# EAGLE board MCU_03 (EAGLE 7.3.0)
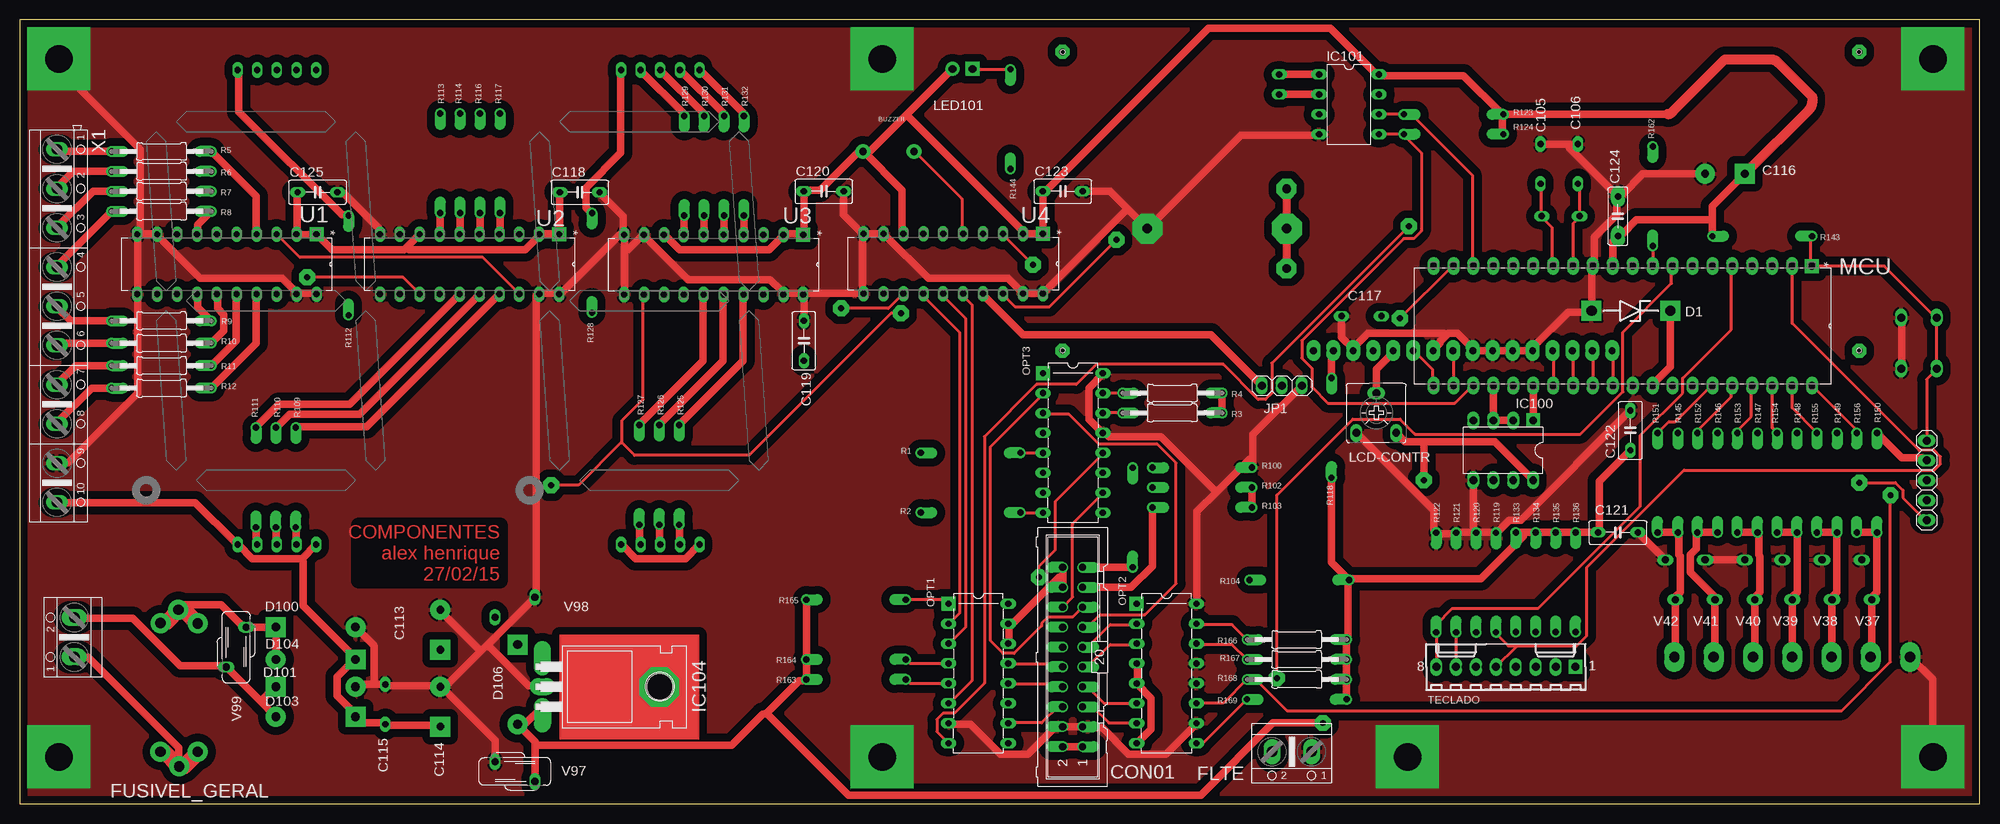
[diagram p0: board, top side]
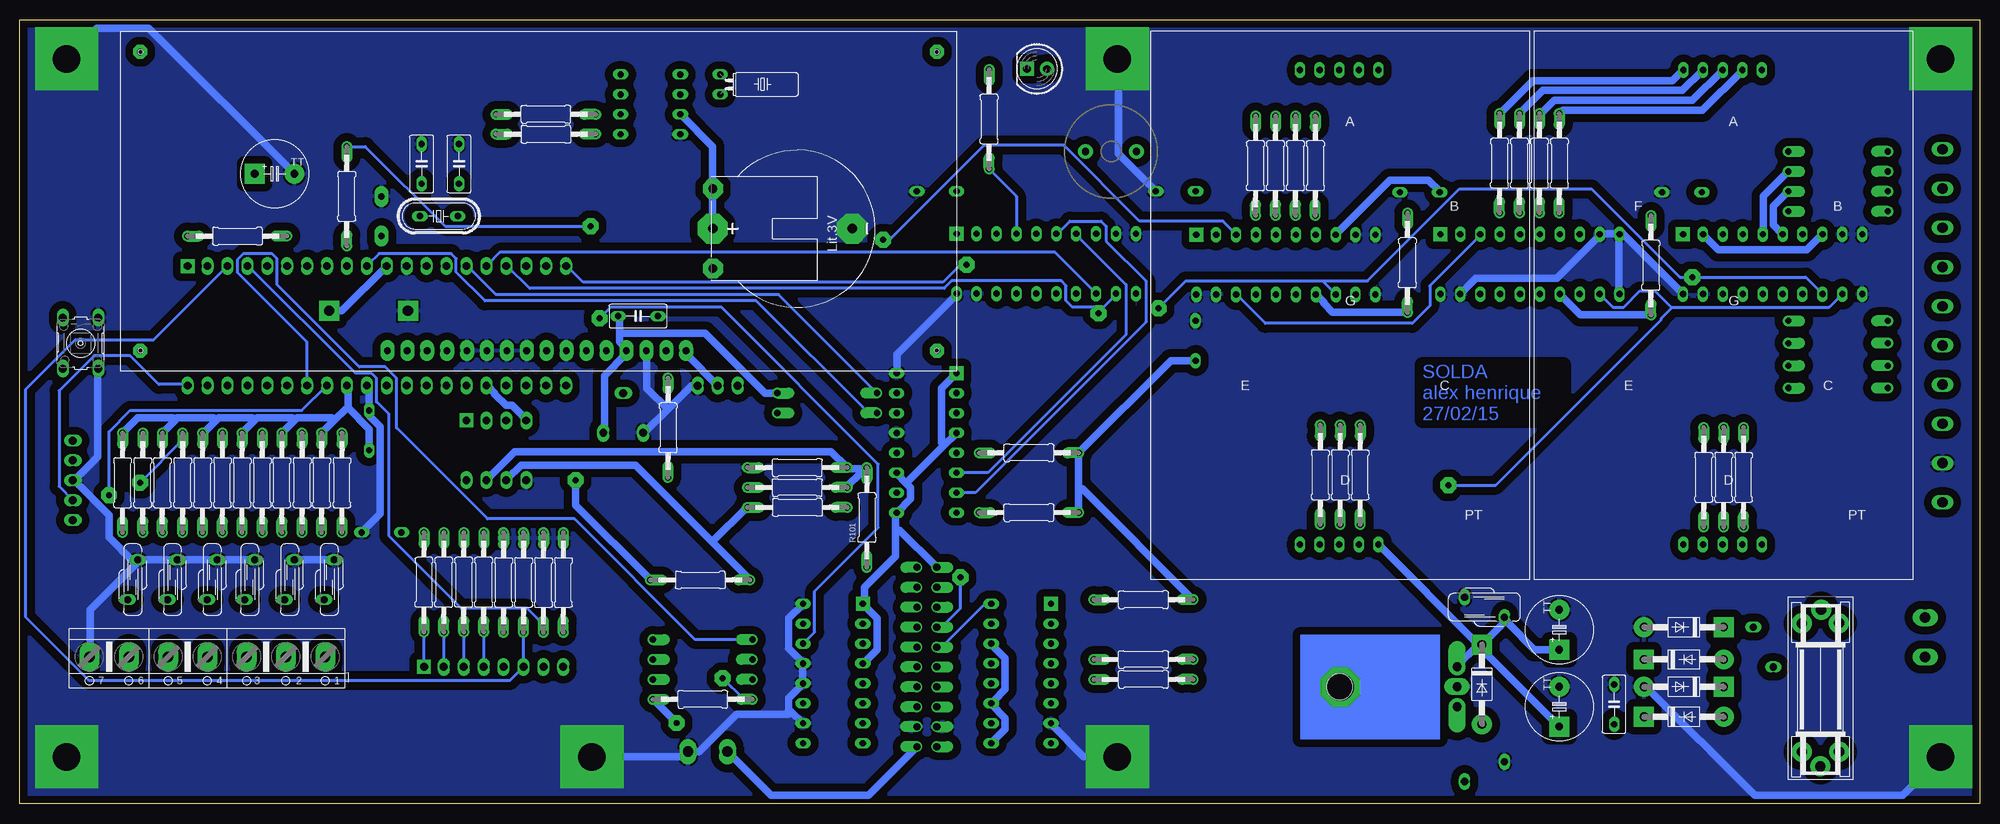
[diagram p1: board, bottom side, seen from below]

Size 250 x 100 mm. Coordinates in mm from the lower left corner, seen from the top.
Outline: 0,0 250,0 250,100 0,100 0,0
Copper layers (1*16): Top 0.035mm / dielectric 1.5mm / Bottom 0.035mm
Design rules "DISPLAY VERY GOOD 002 *": minimum track width 16mil, minimum drill 30mil, track to track 10mil, track to pad 10mil, pad to pad 10mil, via to via 10mil, smd to smd 10mil, copper to edge 20mil, drill to drill 10mil, minimum pad ring 10mil, minimum via ring 25mil, stop-mask expansion 4mil, vias tented up to drill 0mil, thermal gap 10mil
Net classes: 1 rele: width 0.305 mm, clearance 0.254 mm; 2 power: width 0.965 mm, drill 0.051 mm, clearance 0.254 mm

## Footprints (pad centres in the part's own frame; a part is rotated, then mirrored left to right if it is on the bottom)
BUZZER-12MM-NS-KIT = drill 0.9 pad 1.88: + 3.25,0; - -3.25,0
C050-030X075 = drill 0.8 pad 1 long: 1 -2.54,0; 2 2.54,0
TAP5-80 = drill 1 pad 2.54 square: + -2.54,0 | drill 1 pad 2.54: - 2.54,0
C050-025X075 = drill 0.813 pad 1.778 long: 1 -2.54,0; 2 2.54,0
ML20 = drill 0.9 pad 1.016 offset: 1 -11.43,-1.27; 2 -11.43,1.27; 3 -8.89,-1.27; 4 -8.89,1.27; 5 -6.35,-1.27; 6 -6.35,1.27; 7 -3.81,-1.27; 8 -3.81,1.27; 9 -1.27,-1.27; 10 -1.27,1.27; 11 1.27,-1.27; 12 1.27,1.27; 13 3.81,-1.27; 14 3.81,1.27; 15 6.35,-1.27; 16 6.35,1.27; 17 8.89,-1.27; 18 8.89,1.27; 19 11.43,-1.27; 20 11.43,1.27
ZDIO12.5 = drill 1.3 pad 2.54 square: A 4.953,0; C -5.08,0
DO41-10 = drill 1.118 pad 2.54: A 5.08,0 | drill 1.118 pad 2.54 square: C -5.08,0
AK500/2 = drill 1.321 pad 2.184 long: 1 -2.515,0; 2 2.515,0
SH25 = drill 1.321 pad 2.54: 1 -9.802,0.028; 2 10.18,-0.077; 4 -7.938,2.4; 5 -7.938,-2.362; 6 8.435,2.402; 7 8.475,-2.34
CR2032H = drill 1.118 pad 2.54 octagon: + 5.08,10.795; +@1 -5.08,10.795; - 0,-6.985
DIL08 = drill 1 pad 1.778 square: 1 -3.81,-3.81 | drill 1 pad 1.27 long: 2 -1.27,-3.81; 3 1.27,-3.81; 4 3.81,-3.81; 5 3.81,3.81; 6 1.27,3.81; 7 -1.27,3.81; 8 -3.81,3.81
DIL08' = drill 0.813 long: 1 -3.81,-3.81; 2 -1.27,-3.81; 3 1.27,-3.81; 4 3.81,-3.81; 5 3.81,3.81; 6 1.27,3.81; 7 -1.27,3.81; 8 -3.81,3.81
TO220H = drill 1.118 pad 2.184 offset: 1 -2.54,-10.16; 3 2.54,-10.16 | drill 1.118 pad 2.184 long: 2 0,-10.16 | hole 3.302: 0,4.826
1X03 = drill 1.016 long: 1 -2.54,0; 2 0,0; 3 2.54,0
1X05 = drill 1.016 long: 1 -5.08,0; 2 -2.54,0; 3 0,0; 4 2.54,0; 5 5.08,0
CA6V = drill 1.016 long: A -2.54,-2.54; E 2.54,-2.54; S 0,2.54
LED-5MM = drill 1 pad 1.778: A -1.27,0 | drill 1 pad 1.778 square: K 1.27,0
DIP254P1524X635-40 = drill 0.991 pad 1.778 square: 1 -15.24,48.26 | drill 0.991 long: 2 -15.24,45.72; 3 -15.24,43.18; 4 -15.24,40.64; 5 -15.24,38.1; 6 -15.24,35.56; 7 -15.24,33.02; 8 -15.24,30.48; 9 -15.24,27.94; 10 -15.24,25.4; 11 -15.24,22.86; 12 -15.24,20.32; 13 -15.24,17.78; 14 -15.24,15.24; 15 -15.24,12.7; 16 -15.24,10.16; 17 -15.24,7.62; 18 -15.24,5.08; 19 -15.24,2.54; 20 -15.24,0; 21 0,0; 22 0,2.54; 23 0,5.08; 24 0,7.62; 25 0,10.16; 26 0,12.7; 27 0,15.24; 28 0,17.78; 29 0,20.32; 30 0,22.86; 31 0,25.4; 32 0,27.94; 33 0,30.48; 34 0,33.02; 35 0,35.56; 36 0,38.1; 37 0,40.64; 38 0,43.18; 39 0,45.72; 40 0,48.26
DIL16-3 = drill 0.8 pad 1.778 square: 1 -8.89,-3.81 | drill 0.8 long: 2 -6.35,-3.81; 3 -3.81,-3.81; 4 -1.27,-3.81; 5 1.27,-3.81; 6 3.81,-3.81; 7 6.35,-3.81; 8 8.89,-3.81; 9 8.89,3.81; 10 6.35,3.81; 11 3.81,3.81; 12 1.27,3.81; 13 -1.27,3.81; 14 -3.81,3.81; 15 -6.35,3.81; 16 -8.89,3.81
TC38H = drill 0.813 long: 1 -1.27,0; 2 1.27,0
HC49/S = drill 0.813 long: 1 -2.413,0; 2 2.413,0
0207/12 = drill 0.8 pad 1.422 offset: 1 -6.35,0; 2 6.35,0
B3F-10XX = drill 1.016 long: 1 -3.251,2.261; 2 3.251,2.261; 3 -3.251,-2.261; 4 3.251,-2.261
6410-08 = drill 1.016 pad 1.778 square: 1 8.89,0 | drill 1.016 long: 2 6.35,0; 3 3.81,0; 4 1.27,0; 5 -1.27,0; 6 -3.81,0; 7 -6.35,0; 8 -8.89,0
DIP254P762X508-20 = drill 0.8 pad 1.778 square: 1 -7.62,22.86 | drill 0.8 pad 1.27 long: 2 -7.62,20.32; 3 -7.62,17.78; 4 -7.62,15.24; 5 -7.62,12.7; 6 -7.62,10.16; 7 -7.62,7.62; 8 -7.62,5.08; 9 -7.62,2.54; 10 -7.62,0; 11 0,0; 12 0,2.54; 13 0,5.08; 14 0,7.62; 15 0,10.16; 16 0,12.7; 17 0,15.24; 18 0,17.78; 19 0,20.32; 20 0,22.86
2.3"SINGLE_DIGIT_DISPLAY = drill 0.8 long: A 1.735,29.44; B 4.235,29.44; C 1.735,-31.06; COM -5.765,-31.06; D -0.765,-31.06; E -3.265,-31.06; F -3.265,29.44; G -5.765,29.44; NC 4.235,-31.06; PT -0.765,29.44
2X16LCDTOP = drill 0.85 pad 1.778 long: 1 67.06,2.54; 2 64.52,2.54; 3 61.98,2.54; 4 59.44,2.54; 5 56.9,2.54; 6 54.36,2.54; 7 51.82,2.54; 8 49.28,2.54; 9 46.74,2.54; 10 44.2,2.54; 11 41.66,2.54; 12 39.12,2.54; 13 36.58,2.54; 14 34.04,2.54; 15 69.6,2.54; 16 72.14,2.54 | drill 0.8 pad 1.778 octagon: P$1 2.54,40.64; P$2 2.54,2.54; P$3 104.14,2.54; P$4 104.14,40.64 | hole 0.6: 2.54,40.64; 2.54,2.54; 104.14,2.54; 104.14,40.64
S07K11 = drill 0.914 long: 1 -0.635,-2.54; 2 0.635,2.54
S07K230 = drill 0.914 long: 1 -1.27,-2.54; 2 1.27,2.54
AK500/10 = drill 1.321 long: 1 -22.504,0; 2 -17.501,0; 3 -12.497,0; 4 -7.493,0; 5 -2.489,0; 6 2.489,0; 7 7.493,0; 8 12.497,0; 9 17.501,0; 10 22.504,0
AK500/7 = drill 1.321 pad 2.54 long: 1 -15.037,0; 2 -10.008,0; 3 -5.004,0; 4 0,0; 5 5.004,0; 6 10.008,0; 7 15.037,0

## Placement (x,y rotation side)
BUZZER  BUZZERPTH-NS-KIT  [BUZZER-12MM-NS-KIT]  110.81,83.19 0 bottom
C105  22PF  [C050-030X075]  193.97,81.6 90 bottom
C106  22PF  [C050-030X075]  198.73,81.6 90 bottom
C113  1000uF  [TAP5-80]  53.66,22.2 90 bottom
C114  1000uF  [TAP5-80]  53.66,12.4 90 bottom
C115  100NF  [C050-030X075]  46.65,12.7 90 bottom
C116  1000uF  [TAP5-80]  217.49,80.33 0 bottom
C117  100NF  [C050-030X075]  171.13,62.21 0 bottom
C118  100NF  [C050-030X075]  71.44,78 0 top
C119  100NF  [C050-030X075]  100.01,59.05 90 top
C120  100NF  [C050-030X075]  102.55,78.11 0 top
C121  100NF  [C050-030X075]  203.84,34.61 0 top
C122  100NF  [C050-030X075]  205.42,47.62 90 top
C123  100NF  [C050-030X075]  133.03,78.11 0 top
C124  100NF  [C050-025X075]  203.84,74.93 90 top
C125  100NF  [C050-030X075]  38,78 0 top
CON01  CON-FONTE  [ML20]  134.3,18.73 90 top
D1  ZENER-5V  [ZDIO12.5]  205.42,62.87 180 top
D100  1N4004  [DO41-10]  37.76,22.54 180 bottom
D101  1N4004  [DO41-10]  37.76,14.92 180 bottom
D103  1N4004  [DO41-10]  37.76,11.11 0 bottom
D104  1N4004  [DO41-10]  37.76,18.42 0 bottom
D106  1N4004  [DO41-10]  63.5,15.24 270 bottom
FLTE  AUDIO  [AK500/2]  162.24,6.67 180 top
FUSIVEL_GERAL  FUSESH35  [SH25]  20.32,14.58 90 bottom
G100  CR2032H  [CR2032H]  150.79,73.34 90 bottom
IC100  LTC485N  [DIL08]  189.21,45.09 180 top
IC101  DS1307  [DIL08']  169.54,89.2 270 top
IC104  7805T  [TO220H]  76.84,14.94 270 top
JP1  [1X03]  160.97,53.34 0 top
JP100  ICSP  [1X05]  243.2,41.25 270 top
LCD-CONTR  10K  [CA6V]  173.02,49.85 0 top
LED101  HEART_BEAT  [LED-5MM]  120.25,93.71 180 bottom
MCU  PIC18F4525  [DIP254P1524X635-40]  180.32,53.34 270 top
OPT1  OPTOCOUPLER-CNY74-4H-DIP16  [DIL16-3]  122.27,16.64 270 top
OPT2  OPTOCOUPLER-CNY74-4H-DIP16  [DIL16-3]  146.27,16.64 270 top
OPT3  OPTOCOUPLER-CNY74-4H-DIP16  [DIL16-3]  134.34,46.03 270 top
Q100  32.768kHZ  [TC38H]  160.65,91.74 270 bottom
Q101  20MHZ  [HC49/S]  196.53,74.95 180 bottom
R1  1K  [0207/12]  121.28,44.77 0 bottom
R2  1K  [0207/12]  121.28,37.15 0 bottom
R3  4K7  [0207/12]  147,49.85 180 top
R4  4K7  [0207/12]  147,52.39 180 top
R5  470R  [0207/12]  18.1,83.19 180 top
R6  470R  [0207/12]  18.1,80.64 180 top
R7  470R  [0207/12]  18.1,78.11 180 top
R8  470R  [0207/12]  18.1,75.56 180 top
R9  470R  [0207/12]  18.1,61.59 180 top
R10  470R  [0207/12]  18.1,58.74 180 top
R11  470R  [0207/12]  18.1,55.88 180 top
R12  470R  [0207/12]  18.1,53.02 180 top
R100  10k  [0207/12]  150.81,42.88 0 bottom
R101  10k  [0207/12]  141.94,36.51 90 bottom
R102  10k  [0207/12]  150.81,40.34 0 bottom
R103  10k  [0207/12]  150.81,37.8 180 bottom
R104  10k  [0207/12]  163.19,28.55 180 bottom
R109  470R  [0207/12]  35.22,41.63 270 bottom
R110  470R  [0207/12]  32.68,41.63 270 bottom
R111  470R  [0207/12]  30.14,41.63 270 bottom
R112  470R  [0207/12]  41.95,68.67 90 bottom
R113  470R  [0207/12]  53.64,81.68 90 bottom
R114  470R  [0207/12]  56.18,81.68 90 bottom
R116  470R  [0207/12]  58.72,81.68 90 bottom
R117  470R  [0207/12]  61.26,81.68 90 bottom
R118  22R  [0207/12]  167.3,47.94 90 bottom
R119  12K  [0207/12]  188.28,28.24 270 bottom
R120  12K  [0207/12]  185.74,28.24 270 bottom
R121  12K  [0207/12]  183.2,28.24 270 bottom
R122  12K  [0207/12]  180.66,28.24 270 bottom
R123  2K2  [0207/12]  182.88,87.93 0 bottom
R124  2K2  [0207/12]  182.88,85.39 180 bottom
R125  470R  [0207/12]  84.12,41.95 270 bottom
R126  470R  [0207/12]  81.58,41.95 270 bottom
R127  470R  [0207/12]  79.04,41.95 270 bottom
R128  470R  [0207/12]  73,68.98 90 bottom
R129  470R  [0207/12]  84.75,81.36 90 bottom
R130  470R  [0207/12]  87.29,81.36 90 bottom
R131  470R  [0207/12]  89.83,81.36 90 bottom
R132  470R  [0207/12]  92.37,81.36 90 bottom
R133  47K  [0207/12]  190.82,28.26 90 bottom
R134  18K  [0207/12]  193.36,28.26 90 bottom
R135  8K  [0207/12]  195.9,28.26 90 bottom
R136  3K  [0207/12]  198.44,28.26 90 bottom
R143  10K  [0207/12]  222.23,72.39 180 bottom
R144  2K2  [0207/12]  126.36,87.31 90 bottom
R145  12K  [0207/12]  211.48,40.96 270 bottom
R146  12K  [0207/12]  216.56,40.96 270 bottom
R147  12K  [0207/12]  221.64,40.96 270 bottom
R148  12K  [0207/12]  226.67,40.96 270 bottom
R149  12K  [0207/12]  231.8,40.96 270 bottom
R150  12K  [0207/12]  236.88,40.96 270 bottom
R151  1K  [0207/12]  208.89,40.96 270 bottom
R152  1K  [0207/12]  213.97,40.96 270 bottom
R153  1K  [0207/12]  219.05,40.96 270 bottom
R154  1K  [0207/12]  224.13,40.96 270 bottom
R155  1K  [0207/12]  229.21,40.96 270 bottom
R156  1K  [0207/12]  234.29,40.96 270 bottom
R162  1K  [0207/12]  208.28,77.47 270 bottom
R163  1K  [0207/12]  106.68,15.88 0 bottom
R164  1K  [0207/12]  106.68,18.41 0 bottom
R165  1K  [0207/12]  106.68,26.04 0 bottom
R166  4K7  [0207/12]  162.88,20.95 180 top
R167  4K7  [0207/12]  162.88,18.41 180 top
R168  4K7  [0207/12]  162.88,15.88 180 top
R169  4K7  [0207/12]  162.88,13.34 0 bottom
S100  RESET  [B3F-10XX]  242.23,58.74 270 bottom
TECLADO  22-27-2081-08  [6410-08]  189.55,17.46 0 top
U1  TPIC6B595N  [DIP254P762X508-20]  15,65 270 top
U2  TPIC6B595N  [DIP254P762X508-20]  45.95,65 270 top
U3  TPIC6B595N  [DIP254P762X508-20]  77.08,64.95 270 top
U4  TPIC6B595N  [DIP254P762X508-20]  107.63,65.07 270 top
U$101  2.3"DISPLAY_7_SEG  [2.3"SINGLE_DIGIT_DISPLAY]  32.05,64.14 0 bottom
U$102  2X16LCDTOP  [2X16LCDTOP]  237.15,55.25 0 bottom
U$103  2.3"DISPLAY_7_SEG  [2.3"SINGLE_DIGIT_DISPLAY]  80.94,64.14 0 bottom
V37  VARISTORS07K11  [S07K11]  235.59,28.57 180 bottom
V38  VARISTORS07K11  [S07K11]  230.5,28.57 180 bottom
V39  VARISTORS07K11  [S07K11]  225.43,28.57 180 bottom
V40  VARISTORS07K11  [S07K11]  220.66,28.57 180 bottom
V41  VARISTORS07K11  [S07K11]  215.58,28.57 180 bottom
V42  VARISTORS07K11  [S07K11]  210.5,28.57 180 bottom
V97  VARISTORS07K230  [S07K230]  63.18,4.13 90 top
V98  VARISTORS07K230  [S07K230]  63.18,25.08 90 bottom
V99  VARISTORS07K230  [S07K230]  27.62,20 0 top
X1  [AK500/10]  4.76,60.96 270 top
X101  TECLAS-OP  [AK500/7]  226.06,18.75 180 bottom
X102_IN  POWER-IN  [AK500/2]  6.98,21.25 90 top

## Library data of the parts
BUZZER = SparkFun-Electromechanical; PROD_ID: COMP-08253
C105 C106 C113-C125 R1-R12 R100-R104 R109-R114 R116-R136 R143-R156 R162-R169 = rcl
CON01 = con-ml; OC_FARNELL: unknown; OC_NEWARK: unknown
D1 D100 D101 D103 D104 D106 = diode
FLTE X1 X101 X102_IN = con-ptr500; OC_FARNELL: unknown; OC_NEWARK: unknown
FUSIVEL_GERAL = fuse; OC_FARNELL: unknown; OC_NEWARK: unknown
G100 = battery
IC100 = linear-technology; OC_FARNELL: unknown; OC_NEWARK: unknown
IC101 = ds1307_pcf8583
IC104 = linear
JP1 JP100 = pinhead
LCD-CONTR = tango
LED101 = dp_devices
MCU = Microchip_By_element14_Batch_1; MPN: PIC18F4525-I/P; OC_FARNELL: 1212717; OC_NEWARK: 96K3955; PACKAGE: DIP-40; SUPPLIER: Microchip
OPT1-OPT3 = tidyeagle
Q100 Q101 = crystal
S100 = switch-omron; MPN: B3F-1000; OC_FARNELL: 176432; OC_NEWARK: 36M3542
TECLADO = con-molex; OC_FARNELL: unknown; OC_NEWARK: unknown
U1-U4 = Texas Instruments_By_element14_Batch_1; MPN: TPIC6B595N; OC_FARNELL: 1287675; OC_NEWARK: 15M1973; PACKAGE: PDIP-20; SUPPLIER: Texas Instruments
U$101 U$103 = display-alex
U$102 = lcd_modules_ece
V37-V42 V97-V99 = varistor

## Nets
16V-AC-IN1 [power]: FUSIVEL_GERAL.1 X102_IN.1
16V-AC-IN2 [power]: D101.C D103.A V99.1 X102_IN.2
+5V [power]: BUZZER.+ C116.+ C117.1 C118.1 C119.1 C120.1 C121.1 C122.1 C123.1 C124.1 C125.1 D1.C D106.A IC100.8 IC101.8 IC104.3 JP100.2 LCD-CONTR.E LED101.A MCU.11 MCU.32 R1.2 R2.2 R3.1 R4.1 R104.2 R118.1 R123.1 R124.2 R133.2 R134.2 R135.2 R136.2 R143.1 R145.1 R146.1 R147.1 R148.1 R149.1 R150.1 R163.2 R164.2 R165.2 R166.1 R167.1 R168.1 R169.1 U1.1 U1.2 U1.8 U2.1 U2.2 U2.8 U3.1 U3.2 U3.8 U4.1 U4.2 U4.8 U$102.2 V97.1
+12V [power]: C113.+ C114.+ C115.1 D103.C D104.C D106.C IC104.1 U$101.COM U$101.NC U$103.COM U$103.NC V98.1 X1.10
AUDIO [power]: CON01.1 CON01.2 FLTE.2
AVDD [power]: CON01.18 CON01.20 OPT1.9 OPT1.11 OPT1.14 OPT1.15 OPT2.1 OPT2.4 OPT2.5 OPT2.8 OPT3.1 OPT3.4 OPT3.9 OPT3.11
CMD-AUDIO [power]: R148.2 R154.2 V39.2 X101.4
CMD-DESCE [power]: R147.2 R153.2 V40.2 X101.3
CMD-NIVELA [power]: R149.2 R155.2 V38.2 X101.5
CMD-PARA [power]: R146.2 R152.2 V41.2 X101.2
CMD-SOBE [power]: R145.2 R151.2 V42.2 X101.1
CTT_DESCE: OPT1.3 U4.15
CTT_FREIO: OPT1.6 U4.16
CTT_SOBE: OPT1.2 U4.14
D1-A [power]: R129.2 U$103.A
D1-B [power]: R128.2 U$103.B
D1-C [power]: R127.2 U$103.C
D1-D [power]: R126.2 U$103.D
D1-E [power]: R125.2 U$103.E
D1-F [power]: R131.2 U$103.F
D1-G [power]: R132.2 U$103.G
D1-PT [power]: R130.2 U$103.PT
D2-A [power]: R113.2 U$101.A
D2-B [power]: R112.2 U$101.B
D2-C [power]: R111.2 U$101.C
D2-D [power]: R110.2 U$101.D
D2-E [power]: R109.2 U$101.E
D2-F [power]: R116.2 U$101.F
D2-G [power]: R117.2 U$101.G
D2-PT [power]: R114.2 U$101.PT
GND [power]: C105.2 C106.2 C113.- C114.- C115.2 C116.- C117.2 C118.2 C119.2 C120.2 C121.2 C122.2 C123.2 C124.2 C125.2 CON01.3 CON01.4 D1.A D100.A D101.A FLTE.1 G100.- IC100.5 IC101.4 IC104.2 JP1.3 JP100.3 LCD-CONTR.A MCU.12 MCU.31 OPT1.7 OPT2.10 OPT2.12 OPT2.13 OPT2.16 OPT3.13 OPT3.16 R100.1 R119.1 R120.1 R121.1 R122.1 S100.1 S100.2 U1.9 U1.10 U1.11 U1.19 U1.20 U2.9 U2.10 U2.11 U2.19 U2.20 U3.9 U3.10 U3.11 U3.19 U3.20 U4.9 U4.10 U4.11 U4.19 U4.20 U$102.1 U$102.5 U$102.7 U$102.8 U$102.9 U$102.10 V37.1 V38.1 V39.1 V40.1 V41.1 V42.1 V97.2 V98.2 X1.9 X101.7
IR-ATE [power]: R150.2 R156.2 V37.2 X101.6
LCD_BLK [power]: JP1.2 U$102.16
LCD_NEG [power]: JP1.1 U4.17
MAX485-A [power]: IC100.6 R102.1 R103.2 R104.1
MAX485-B [power]: IC100.7 R100.2 R101.2 R102.2
MCLR: JP100.1 MCU.1 R143.2 S100.3 S100.4
N$2: LED101.K R144.2
N$3: U2.3 U3.18
N$4 [power]: R118.2 U$102.15
N$5 [power]: R117.1 U2.4
N$6 [power]: R116.1 U2.5
N$7 [power]: R114.1 U2.6
N$8 [power]: R113.1 U2.7
N$9 [power]: IC101.1 Q100.1
N$10 [power]: IC101.2 Q100.2
N$11 [power]: R112.1 U2.14
N$12 [power]: R111.1 U2.15
N$14 [power]: R110.1 U2.16
N$15 [power]: R109.1 U2.17
N$17: R133.1 TECLADO.4
N$18: U3.3 U4.18
N$19: OPT3.6 U4.7
N$20 [power]: R132.1 U3.4
N$21 [power]: R131.1 U3.5
N$22 [power]: R130.1 U3.6
N$23 [power]: R129.1 U3.7
N$24 [power]: R128.1 U3.14
N$25 [power]: R127.1 U3.15
N$26 [power]: R126.1 U3.16
N$27 [power]: R125.1 U3.17
N$28: OPT3.7 U4.6
N$29: OPT3.5 R1.1
N$30: OPT3.8 R2.1
N$31: R144.1 U4.4
N$32: R134.1 TECLADO.3
N$33: R135.1 TECLADO.2
N$34: R136.1 TECLADO.1
N$35: BUZZER.- U4.5
N$36: CON01.13 OPT3.3
N$37: CON01.15 OPT3.2
N$40: OPT1.1 R165.1
N$41: OPT1.4 R164.1
N$42: OPT1.5 R163.1
N$43: OPT1.8 R162.1
N$45: U1.3 U2.18
N$46 [power]: R5.1 U1.4
N$47 [power]: R6.1 U1.5
N$48 [power]: R7.1 U1.6
N$49 [power]: R8.1 U1.7
N$50 [power]: R9.1 U1.14
N$51 [power]: R10.1 U1.15
N$52 [power]: R11.1 U1.16
N$53 [power]: R12.1 U1.17
N$54 [power]: R5.2 X1.1
N$55 [power]: R6.2 X1.2
N$56 [power]: R7.2 X1.3
N$57 [power]: R8.2 X1.4
N$58 [power]: R9.2 X1.5
N$59 [power]: R10.2 X1.6
N$60 [power]: R11.2 X1.7
N$61 [power]: R12.2 X1.8
OPT_AUDIO_FALA: CON01.16 OPT3.10
OPT_AUDIO_LIGA: CON01.14 OPT3.12
OPT_DESCE: CON01.10 OPT1.13
OPT_FIM_INFERIOR: CON01.7 OPT2.6
OPT_FIM_SUPERIOR: CON01.9 OPT2.3
OPT_FREIO: CON01.8 OPT1.12
OPT_LIGA: CON01.6 OPT1.10
OPT_PANTOGRAFICA: CON01.11 OPT2.2
OPT_SENSOR1: CON01.5 OPT2.7
OPT_SOBE: CON01.12 OPT1.16
RA0: MCU.2 R119.2 TECLADO.5
RA1: MCU.3 R120.2 TECLADO.6
RA2: MCU.4 R121.2 TECLADO.7
RA3: MCU.5 R122.2 TECLADO.8
RA4: MCU.6
RA5: MCU.7
RA6: C105.1 MCU.14 Q101.1
RA7: C106.1 MCU.13 Q101.2
RB0: MCU.33 OPT2.11 R168.2
RB1: MCU.34 OPT2.15 R166.2
RB2: MCU.35 R151.1
RB3: MCU.36 R152.1
RB4: MCU.37 R153.1
RB5: MCU.38 R154.1
RB6: JP100.5 MCU.39 R155.1
RB7: JP100.4 MCU.40 R156.1
RC0: MCU.15 OPT3.15 R4.2
RC1: MCU.16 U1.13 U2.13 U3.13 U4.13
RC2: MCU.17 U1.12 U2.12 U3.12 U4.12
RC3: IC101.6 MCU.18 R123.2
RC4: IC101.5 MCU.23 R124.1
RC5 [power]: IC100.2 IC100.3 MCU.24
RC6 [power]: IC100.4 MCU.25
RC7 [power]: IC100.1 MCU.26
RD0: MCU.19 OPT2.14 R167.2
RD1: MCU.20 U4.3
RD2: MCU.21 U$102.4
RD3: MCU.22 U$102.6
RD4: MCU.27 U$102.11
RD5: MCU.28 U$102.12
RD6: MCU.29 U$102.13
RD7: MCU.30 U$102.14
RE0: MCU.8 OPT2.9 R169.2
RE1: MCU.9 R162.2
RE2: MCU.10 OPT3.14 R3.2
RS485-A [power]: CON01.17 R103.1
RS485-B [power]: CON01.19 R101.1
SAIDA_FUSIVEL [power]: D100.C D104.A FUSIVEL_GERAL.2 V99.2
VBAT+ [power]: G100.+ IC101.3
VOO [power]: LCD-CONTR.S U$102.3

## Tracks (layer width: path | path; a pad name or v marks a point on that pad's centre or on a via)
16V-AC-IN1
  Top 0.965: X102_IN.1 8.73,18.73 20.32,7.14 20.32,4.92 FUSIVEL_GERAL.1
16V-AC-IN2
  Top 0.965: 30.72,13.1 32.54,11.27 D103.A | 30.72,13.1 V99.1 25.88,17.62 20.48,17.62 14.45,23.65 6.99,23.65 X102_IN.2 | 30.72,13.1 32.54,14.92 D101.C
+5V  (via drill 0.76)
  Top 0.965: U4.8 112.55,72.71 112.55,78.26 107.63,83.19 BUZZER.+ | 113.11,87.87 108.27,83.03 BUZZER.+ | 113.11,87.87 118.9,93.66 LED101.A | 113.11,87.87 127.79,73.18 U4.2 127.95,72.71 130.02,72.71 U4.1 130.49,72.71 C123.1 130.97,78.26 151.61,98.9 167.16,98.9 172.88,93.19 IC101.8 173.35,92.87 184.15,92.87 189.07,87.95 R123.1 | BUZZER.+ 107.16,83.34 102.08,78.26 100.49,78.26 C120.1 100.01,72.71 U3.1 99.54,72.71 97.47,72.71 U3.2 97.16,72.23 95.57,70.64 84.14,70.64 82.23,72.55 U3.8 | C118.1 68.9,72.71 U2.1 68.42,72.71 66.36,72.71 U2.2 66.04,72.23 64.45,70.64 49.69,70.64 49.37,70.96 | 49.37,70.96 49.05,70.64 39.85,70.64 37.94,72.55 U1.1 37.47,72.55 35.88,72.55 U1.2 35.4,72.71 35.4,77.95 C125.1 | 49.37,70.96 50.96,72.55 U2.8 | 65.72,7.46 65.72,7.94 D106.A 64.29,10 66.67,12.38 IC104.3 67.15,12.22 | 65.72,7.46 V97.1 | R165.2 R164.2 R163.2 99.85,15.72 99.38,15.72 95.25,11.59 | R124.2 189.07,85.41 189.07,87.47 R123.1 | 215.9,74.45 215.9,76.2 C116.+ | 215.9,74.45 215.9,72.55 R143.1 | MCU.11 203.2,68.74 203.2,71.75 C124.1 204.31,72.55 206.22,74.45 215.9,74.45 | 210.19,87.95 189.71,87.95 R123.1 | 179.07,46.2 176.69,46.2 175.58,47.31 LCD-CONTR.E | 179.07,46.2 188.12,46.2 192.88,41.43 IC100.8 | R4.1 R3.1 | R169.1 R168.1 R167.1 R166.1 169.39,21.43 169.39,28.42 R104.2 | R118.1 167.32,41.59 167.32,30.8 169.23,28.89 R104.2 | 191.77,34.61 R134.2 R135.2 R136.2 C121.1 201.45,35.08 201.45,41.12 C122.1 | 191.77,34.61 R133.2 | JP100.2 243.05,43.81 242.73,44.13 240.03,44.13 237.01,47.15 R150.1 | R104.2 170.02,28.73 186.37,28.73 191.77,34.13 191.77,34.61 | v179.07,41.27 179.07,46.2 | D1.C 210.5,55.72 208.28,53.5 MCU.32
  Top 0.965: v166.21,10.32 159.86,10.32 150.65,1.11 105.73,1.11 95.25,11.59 | 65.72,7.46 90.81,7.46 94.77,11.43 95.25,11.59
  Top 1.27: 210.19,87.95 arc45 210.73,88.17 217.49,94.93 223.31,94.93 arc-45 224.21,94.56 228.6,90.17 228.6,89.43 arc-45 228.23,88.53 C116.+
  Bottom 0.965: U3.8 82.07,72.71 75.25,79.53 70.33,79.53 68.9,78.11 C118.1 | U1.8 20.16,72.55 22.07,70.64 33.34,70.64 35.24,72.55 U1.2 | C119.1 103.19,56.52 R1.2 114.94,40.16 | 114.94,40.16 R2.2 | R165.2 114.46,40.16 114.94,40.16 | D1.C 208.91,62.87 203.2,68.58 MCU.11 | 173.51,60.01 173.51,58.9 172.56,57.94 U$102.2 172.72,57.31 175.42,54.61 175.42,47.47 LCD-CONTR.E | 173.51,60.01 173.51,62.07 C117.1 | R4.1 154.94,52.39 162.56,60.01 173.51,60.01 | C122.1 205.42,47.78 208.12,50.48 | 208.12,50.48 208.12,53.34 MCU.32 | 209.87,48.9 208.44,50.32 208.12,50.48 | 209.87,48.9 211.46,47.31 R145.1 | 214.95,48.9 214.63,49.21 210.19,49.21 209.87,48.9 | 214.95,48.9 216.53,47.31 R146.1 | 220.03,48.9 219.71,49.21 215.26,49.21 214.95,48.9 | 220.03,48.9 221.62,47.31 R147.1 | 224.95,48.9 224.63,49.21 220.34,49.21 220.03,48.9 | 224.95,48.9 226.54,47.31 R148.1 | 230.19,48.9 229.87,49.21 225.27,49.21 224.95,48.9 | 230.19,48.9 231.78,47.31 R149.1 | R150.1 236.85,47.31 234.95,49.21 230.5,49.21 230.19,48.9 | v179.07,41.27 179.07,38.1 169.54,28.57 R104.2 | R169.1 v166.21,10.32
+12V
  Top 0.965: 36.04,31.27 29.69,31.27 27.94,33.02 U$101.NC 27.46,33.34 22.38,38.42 4.76,38.42 X1.10 | 36.04,31.27 37.78,33.02 U$101.COM | C114.+ 53.66,10 46.99,10 C115.1 46.51,10.32 43.66,10.32 42.86,11.11 D103.C 42.7,11.59 40.48,13.81 40.48,16.19 42.7,18.41 D104.C 42.55,18.89 36.2,25.24 36.2,30.8 36.04,31.27 | U$103.NC 76.83,33.02 78.58,31.27 84.93,31.27 86.68,33.02 U$103.COM
  Bottom 0.965: D106.C 60.64,23.18 V98.1 60.17,23.02 56.83,19.68 53.66,19.68 C113.+ | IC104.1 66.67,17.62 63.98,20.32 D106.C | U$103.NC 76.68,33.02 64.29,20.64 D106.C | C114.+ 53.82,10 63.66,19.84 D106.C
AUDIO
  Top 0.965: CON01.1 CON01.2
  Bottom 0.965: CON01.1 141.76,1.11 154.15,1.11 159.7,6.67 FLTE.2
AVDD
  Top 0.965: OPT1.14 126.21,20.48 126.21,22.86 OPT1.15 126.68,23.02 132.56,28.89 133.03,28.89 | CON01.20 133.03,28.89 | 133.03,28.89 CON01.18 | OPT2.8 142.56,7.78 144.3,9.53 144.3,13.49 142.56,15.24 OPT2.5 142.56,15.72 142.56,17.78 OPT2.4
  Bottom 0.965: OPT1.9 126.05,7.78 124.3,9.53 124.3,10.95 126.05,12.7 OPT1.11 125.73,13.18 124.3,14.61 124.3,18.57 126.05,20.32 OPT1.14 | OPT2.4 142.4,17.94 140.65,19.68 140.65,23.65 142.4,25.4 OPT2.1 142.24,25.88 142.24,27.62 138.27,31.59 138.27,34.92 | 136.92,40.88 138.11,42.07 OPT3.11 | 136.92,40.88 136.37,40.32 136.37,38.89 138.11,37.15 OPT3.9 138.27,36.67 138.27,34.92 | 136.92,40.88 132.08,45.72 | 132.08,45.72 130.65,47.15 OPT3.4 | OPT3.1 130.65,54.77 132.4,53.02 132.4,46.04 132.08,45.72 | CON01.20 137.79,34.92 138.27,34.92
CMD-AUDIO
  Top 0.965: R154.2 224.16,34.61 226.54,34.61 R148.2 226.69,34.13 226.69,26.99 226.22,26.51 V39.2 226.06,18.89 X101.4
CMD-DESCE
  Top 0.965: R153.2 219.07,34.61 221.62,34.61 R147.2 221.77,34.13 221.77,31.75 221.93,31.59 221.93,26.99 221.46,26.51 V40.2 221.3,19.05 221.14,18.89 X101.3
CMD-NIVELA
  Top 0.965: R155.2 229.24,34.61 231.78,34.61 R149.2 231.78,34.13 231.78,26.99 231.3,26.51 V38.2 231.14,18.89 X101.5
CMD-PARA
  Top 0.965: R146.2 216.53,34.61 214,34.61 R152.2 213.84,34.13 213.84,32.54 213.04,31.75 213.04,29.53 216.06,26.51 V41.2 216.22,19.05 216.06,18.89 X101.2
CMD-SOBE
  Top 0.965: R151.2 208.91,34.61 211.46,34.61 R145.2 211.61,34.13 211.61,31.75 211.77,31.59 211.77,26.99 211.3,26.51 V42.2 211.14,18.89 X101.1
CTT_DESCE
  Top 0.406: OPT1.3 118.59,20.48 120.65,22.54 120.65,61.91 117.63,64.93 U4.15
CTT_FREIO
  Top 0.406: OPT1.6 118.59,12.86 121.44,15.72 121.44,63.66 120.17,64.93 U4.16
CTT_SOBE
  Top 0.406: OPT1.2 118.59,23.02 119.86,24.29 119.86,60.17 115.09,64.93 U4.14
D1-A
  Top 0.965: U$103.A 79.22,93.5 84.61,88.11 84.61,87.79 R129.2
D1-B
  Top 0.965: U$103.B 76.68,93.5 76.68,83.03 72.23,78.58 72.23,76.04 72.87,75.41 R128.2
D1-C
  Top 0.965: U$103.C 79.06,33.18 79.06,35.56 R127.2
D1-D
  Top 0.965: U$103.D 81.6,33.18 81.6,35.56 R126.2
D1-E
  Top 0.965: U$103.E 84.14,33.18 84.14,35.56 R125.2
D1-F
  Top 0.965: U$103.F 84.3,93.5 89.69,88.11 89.69,87.79 R131.2
D1-G
  Top 0.965: U$103.G 86.84,93.5 92.23,88.11 92.23,87.79 R132.2
D1-PT
  Top 0.965: U$103.PT 81.76,93.5 87.15,88.11 87.15,87.79 R130.2
D2-A
  Bottom 0.965: U$101.A 30.32,93.5 35.4,88.42 53.18,88.42 53.5,88.11 R113.2
D2-B
  Top 0.965: U$101.B 27.94,93.5 27.94,88.27 41.12,75.09 41.91,75.09 R112.2
D2-C
  Top 0.965: U$101.C 30.16,33.18 30.16,35.24 R111.2
D2-D
  Top 0.965: U$101.D 32.7,33.18 32.7,35.24 R110.2
D2-E
  Top 0.965: U$101.E 35.24,33.18 35.24,35.24 R109.2
D2-F
  Bottom 0.965: U$101.F 35.4,93.5 37.94,90.96 55.72,90.96 58.58,88.11 R116.2
D2-G
  Bottom 0.965: U$101.G 37.94,93.5 39.21,92.23 56.99,92.23 61.12,88.11 R117.2
D2-PT
  Bottom 0.965: U$101.PT 32.86,93.5 36.67,89.69 54.29,89.69 56.04,87.95 R114.2
GND  (via drill 1.2 pad 3.81, 3.5 pad 8)
  Top 0.965: 45.24,15.24 43.02,15.24 42.86,15.08 D101.A | 45.24,15.24 46.51,15.24 C115.2 46.99,15.08 53.18,15.08 C114.- | 45.24,15.24 45.24,20.16 42.86,22.54 D100.A | V97.2 60.64,8.1 53.82,14.92 C114.- | 58.82,19.45 54.29,14.92 C114.- | 58.82,19.45 59.69,20.32 | 59.69,20.32 V98.2 65.88,26.83 65.88,64.77 U2.19 66.36,65.09 68.74,65.09 U2.20 69.22,65.25 76.52,72.55 U3.10 | 59.69,20.32 64.93,15.08 66.67,15.08 IC104.2 | 58.82,19.45 53.66,24.61 C113.- | U1.10 15.08,72.55 15.08,65.09 U1.11 15.08,64.61 15.08,52.39 6.19,43.5 4.76,43.5 X1.9 | U1.10 15.56,72.71 17.46,72.71 U1.9 17.78,72.23 23.02,66.99 33.5,66.99 35.08,65.41 U1.19 35.4,65.09 37.78,65.09 U1.20 | C125.2 40.64,77.95 41.27,77.95 45.88,73.34 45.88,72.71 U2.10 | C118.2 73.98,77.95 76.99,74.93 76.99,72.71 U3.10 | 77.15,70.64 77.15,72.07 U3.10 | 77.15,70.64 77.15,65.09 U3.11 | 77.15,70.64 77.63,70.64 79.53,72.55 U3.9 79.85,72.23 85.25,66.83 95.73,66.83 97.16,65.41 U3.19 97.47,65.09 99.54,65.09 U3.20 | C120.2 105.09,75.09 107.47,72.71 U4.10 | U4.10 108.11,72.71 110.01,72.71 U4.9 110.49,72.39 115.89,66.99 126.05,66.99 127.64,65.41 U4.19 127.95,65.09 130.33,65.09 U4.20 130.81,65.41 141.29,75.88 | C119.2 100.01,64.93 U3.20 | U3.20 100.49,65.09 107.47,65.09 U4.11 107.47,65.56 107.47,72.23 U4.10 | V42.1 C121.2 | S100.2 240.03,55.56 240.03,61.91 S100.1 | V40.1 V41.1 | OPT3.16 138.11,54.77 136.37,53.02 136.37,49.05 138.11,47.31 OPT3.13 138.59,47.15 138.91,46.83 145.57,46.83 152.64,39.77 | 165.74,85.41 IC101.4 165.26,85.25 155.73,85.25 144.15,73.66 G100.- 143.67,73.5 141.29,75.88 | C123.2 139.06,78.11 141.29,75.88 | OPT1.7 118.59,10.16 121.28,10.16 125.09,6.35 128.59,6.35 132.08,9.84 CON01.4 CON01.3 136.05,9.68 138.11,9.68 141.45,6.35 146.21,6.35 150.02,10.16 OPT2.10
  Top 0.965: IC100.5 185.42,41.27 185.42,34.77 185.58,34.61 R120.1 | R120.1 186.21,34.61 188.12,34.61 R119.1 188.59,34.77 190.02,36.2 191.45,36.2 C122.2 | R120.1 184.94,34.61 183.67,34.61 R121.1 183.04,34.45 180.66,34.45 R122.1 180.34,34.92 180.34,37.47 170.5,47.31 LCD-CONTR.A | C117.2 168.59,62.07 168.59,59.53 170.18,57.94 U$102.1 170.34,58.42 171.93,60.01 181.61,60.01 181.93,59.69 | 157.32,43.97 157.32,47.15 JP1.3 | 157.32,43.97 157.32,43.02 R100.1 | 197.64,84.14 198.6,84.14 C106.2 | 197.64,84.14 193.99,84.14 C105.2 | C124.2 197.64,83.66 197.64,84.14 | C116.- 207.01,80.33 204.31,77.63 C124.2 | 181.93,59.69 182.25,60.01 183.36,60.01 185.42,57.94 U$102.7 185.9,57.78 187.8,57.78 U$102.8 188.28,57.78 190.34,57.78 U$102.9 190.82,57.78 192.88,57.78 U$102.10 193.04,58.26 197.49,62.71 200.03,62.71 D1.A 200.5,62.87 200.5,68.58 MCU.12 200.82,69.06 200.82,72.23 203.68,75.09 203.68,76.99 C124.2 | 181.93,59.69 181.13,58.9 181.13,58.74 180.34,57.94 U$102.5 | 152.64,39.77 156.84,43.97 157.32,43.97 | 152.64,39.77 150.18,37.31 150.18,25.56 OPT2.16 | v244,6 244,6.03 244,15.88 241.14,18.73 X101.7 | v5,95 5.08,94.93 5.08,93.82 15.4,83.5 15.4,73.18 U1.10
  Bottom 0.965: U2.11 46.04,65.09 46.04,72.55 U2.10 | U2.10 46.51,72.71 48.42,72.71 U2.9 48.74,72.23 53.98,66.99 64.29,66.99 66.2,65.09 U2.19 | U1.20 37.94,65.09 45.56,72.71 U2.10 | MCU.31 205.58,53.34 205.42,53.18 C122.2 205.26,49.69 205.26,49.37 203.99,48.1 203.99,36.99 C121.2 | S100.2 240.03,55.4 240.03,44.29 243.05,41.27 JP100.3 242.73,40.96 238.6,36.83 238.6,33.97 235.43,30.8 V37.1 | V40.1 V39.1 V38.1 V37.1 | X101.7 240.98,18.89 240.98,24.77 235.11,30.64 V37.1 | V41.1 V42.1 | OPT3.16 138.11,54.93 138.11,57.31 130.49,64.93 U4.20 | 151.61,11.75 151.92,12.06 151.92,13.49 150.18,15.24 OPT2.12 150.18,15.72 150.18,17.78 OPT2.13 150.34,18.26 151.92,19.84 151.92,23.65 150.18,25.4 OPT2.16 | 151.61,11.75 150.18,10.32 OPT2.10 | 151.61,11.75 151.92,11.43 158.59,11.43 163.35,6.67 FLTE.1 165.1,6.35 165.42,6.03 176.85,6.03 v177,6 | JP1.3 164.31,53.34 167.32,50.32 | 167.32,50.32 170.34,47.31 LCD-CONTR.A | 167.32,50.32 170.02,53.02 170.02,57.78 U$102.1 | v5,6 5.08,5.87 9.84,1.11 28.73,1.11 42.7,15.08 D101.A | v110,6 110.01,6.03 114.3,6.03 118.43,10.16 OPT1.7 | C120.2 109.86,82.87 109.86,94.93 v110,95 | C116.- 233.52,98.9 240.19,98.9 244,95.09 v244,95
  other vias: 143.83,73.34
  pour Bottom (isolate 1): 0,100.01 250.19,100.01 250.19,0 0,0
  pour Top (isolate 1): 0,100.01 250.19,100.01 250.19,0 0,0
IR-ATE
  Top 0.965: R156.2 234.31,34.61 236.85,34.61 R150.2 236.85,34.13 236.85,26.99 236.38,26.51 V37.2 236.22,18.89 X101.6
LCD_BLK
  Bottom 0.965: JP1.2 164.94,57.31 164.94,57.78 U$102.16
LCD_NEG
  Top 0.965: JP1.1 151.92,59.85 127.95,59.85 122.87,64.93 U4.17
MAX485-A
  Top 0.965: R103.2 157.16,37.94 157.16,40.32 R102.1
  Bottom 0.965: 161.69,33.42 156.84,28.57 R104.1 | 161.69,33.42 171.45,43.18 186.06,43.18 187.8,41.43 IC100.6 | 161.69,33.42 157.32,37.78 R103.2
MAX485-B
  Bottom 0.965: IC100.7 190.34,41.43 186.85,44.93 146.53,44.93 144.62,43.02 R100.2 143.99,42.7 142.08,42.7 R101.2 142.72,42.23 144.46,40.48 R102.2
MCLR
  Top 0.406: R143.2 228.44,72.39 228.44,68.74 MCU.1 228.76,68.58 237.81,68.58 244.32,62.07 S100.3 244.47,61.91 244.47,55.56 S100.4 244.47,55.4 243.21,54.13 243.21,46.35 JP100.1
N$1
  Top 2: 17.78,6.67 18.41,6.67 20.32,4.76 20.95,4.76 22.86,6.67
N$2
  Top 0.406: R144.2 121.6,93.66 LED101.K
N$3
  Bottom 0.406: U3.18 94.77,64.93 91.12,61.28 72.39,61.28 70.17,63.5 70.17,66.04 63.66,72.55 U2.3
N$4
  Top 0.965: R118.2 167.32,54.45 167.32,57.63 167.48,57.78 U$102.15
N$5
  Top 0.965: U2.4 61.28,72.71 61.28,75.25 R117.1
N$6
  Top 0.965: U2.5 58.74,72.71 58.74,75.25 R116.1
N$7
  Top 0.965: U2.6 56.2,72.71 56.2,75.25 R114.1
N$8
  Top 0.965: U2.7 53.66,72.71 53.66,75.25 R113.1
N$9
  Top 0.965: Q100.1 160.66,93.03 165.58,93.03 IC101.1
N$10
  Top 0.965: Q100.2 160.66,90.49 165.58,90.49 IC101.2
N$11
  Bottom 0.965: U2.14 53.5,64.93 50.96,62.39 42.07,62.39 R112.1
N$12
  Top 0.965: U2.15 56.04,64.93 42.07,50.96 33.02,50.96 30.16,48.1 R111.1
N$13  (via drill 3.5)
  other vias: 81.6,14.92
N$14
  Top 0.965: U2.16 58.58,64.93 43.34,49.69 34.45,49.69 32.7,47.94 R110.1
N$15
  Top 0.965: U2.17 61.12,64.93 44.29,48.1 35.24,48.1 R109.1
N$17
  Bottom 0.406: R133.1 TECLADO.4
N$18  (via drill 0.76)
  Top 0.406: v139.86,71.91 131.29,63.34 127,63.34 125.41,64.93 U4.18
  Bottom 0.406: v139.86,71.91 139.06,71.91 127,83.98 116.84,83.98 107.16,74.3 96.52,74.3 94.93,72.71 U3.3
N$19
  Bottom 0.406: OPT3.6 130.49,42.23 126.52,42.23 108.9,59.85 108.9,66.2 115.25,72.55 U4.7
N$20
  Top 0.965: U3.4 92.39,72.71 92.39,74.93 R132.1
N$21
  Top 0.965: U3.5 89.85,72.71 89.85,74.93 R131.1
N$22
  Top 0.965: U3.6 87.31,72.71 87.31,74.93 R130.1
N$23
  Top 0.965: U3.7 84.77,72.71 84.77,74.93 R129.1
N$24
  Bottom 0.965: U3.14 84.61,64.93 83.66,63.98 83.66,63.82 82.55,62.71 73.03,62.71 R128.1
N$25
  Top 0.965: U3.15 87.15,64.93 87.15,56.52 79.06,48.42 R127.1
N$26
  Top 0.965: U3.16 89.69,64.93 89.69,56.52 81.6,48.42 R126.1
N$27
  Top 0.965: U3.17 92.23,64.93 92.23,56.52 84.14,48.42 R125.1
N$28
  Bottom 0.406: OPT3.7 130.49,39.69 128.11,39.69 106.36,61.44 106.36,66.67 111.44,71.75 111.44,73.66 112.08,74.3 116.05,74.3 117.63,72.71 U4.6
N$29
  Top 0.406: R1.1 130.49,44.77 OPT3.5
N$30
  Top 0.406: R2.1 130.49,37.15 OPT3.8
N$31
  Bottom 0.406: R144.1 122.87,77.47 122.87,72.71 U4.4
N$32
  Bottom 0.406: R134.1 TECLADO.3
N$33
  Bottom 0.406: R135.1 TECLADO.2
N$34
  Bottom 0.406: TECLADO.1 R136.1
N$35
  Top 0.406: U4.5 120.17,72.71 120.17,77.15 114.14,83.19 BUZZER.-
N$36
  Top 0.406: CON01.13 136.21,22.54 137.79,24.13 143.51,24.13 147.48,28.1 147.48,43.5 145.1,45.88 137.64,45.88 133.83,49.69 130.65,49.69 OPT3.3
N$37
  Top 0.406: CON01.15 134.3,23.81 131.13,23.81 130.33,23.02 130.33,22.7 126.84,19.21 125.41,19.21 123.83,20.8 123.83,45.56 130.49,52.23 OPT3.2
N$40
  Top 0.406: R165.1 117.95,26.04 118.43,25.56 OPT1.1
N$41
  Top 0.406: R164.1 113.51,17.94 118.43,17.94 OPT1.4
N$42
  Top 0.406: R163.1 113.51,15.4 118.43,15.4 OPT1.5
N$43  (via drill 0.76)
  Top 0.406: v177.16,73.66 159.7,56.2 159.7,52.39 158.91,51.59 157.96,51.59 153.51,56.04 137.32,56.04 134.78,53.5 129.7,53.5 123.03,46.83 123.03,15.4 119.22,11.59 117.79,11.59 117,10.79 117,9.21 118.43,7.78 OPT1.8
  Bottom 0.406: v177.16,73.66 195.74,73.66 205.9,83.82 R162.1
N$45
  Top 0.406: U1.3 32.86,72.55 35.72,69.69 59.05,69.69 63.66,65.09 U2.18
N$46
  Top 0.965: R5.1 30.16,77.47 30.16,72.71 U1.4
N$47
  Bottom 0.965: R6.1 27.62,77.47 27.62,72.71 U1.5
N$48
  Bottom 0.965: R7.1 26.35,76.2 26.35,73.82 25.24,72.71 U1.6
N$49
  Top 0.965: R8.1 22.7,73.82 22.7,72.71 U1.7
N$50
  Top 0.965: R9.1 22.7,63.34 22.7,64.93 U1.14
N$51
  Top 0.965: R10.1 26.04,60.33 26.04,62.39 25.24,63.18 25.24,64.93 U1.15
N$52
  Top 0.965: R11.1 27.62,59.05 27.62,64.93 U1.16
N$53
  Top 0.965: R12.1 30.16,58.74 30.16,64.93 U1.17
N$54
  Top 0.965: R5.2 4.92,83.19 4.76,83.34 X1.1
N$55
  Top 0.965: R6.2 6.83,80.64 4.76,78.58 X1.2
N$56
  Top 0.965: R7.2 9.37,78.11 4.76,73.5 X1.3
N$57
  Top 0.965: R8.2 4.76,68.58 X1.4
N$58
  Top 0.965: R9.2 6.51,61.59 4.76,63.34 X1.5
N$59
  Top 0.965: R10.2 4.92,58.74 4.76,58.58 X1.6
N$60
  Top 0.965: R11.2 7.14,55.88 4.76,53.5 X1.7
N$61
  Top 0.965: R12.2 9.21,53.02 4.76,48.58 X1.8
OPT_AUDIO_FALA
  Top 0.406: CON01.16 134.3,26.35 134.3,35.72 138.11,39.53 OPT3.10
OPT_AUDIO_LIGA  (via drill 0.76)
  Top 0.406: v130.02,28.89 130.02,30.32 132.08,32.38 132.08,38.58 138.11,44.61 OPT3.12
  Bottom 0.406: v130.02,28.89 130.02,24.92 132.4,22.54 CON01.14
OPT_DESCE
  Top 0.406: CON01.10 132.72,17.78 126.21,17.78 OPT1.13
OPT_FIM_INFERIOR
  Top 0.406: CON01.7 136.21,14.92 138.27,12.86 142.4,12.86 OPT2.6
OPT_FIM_SUPERIOR
  Top 0.406: CON01.9 136.21,17.46 139.06,20.32 142.4,20.32 OPT2.3
OPT_FREIO
  Top 0.406: CON01.8 132.72,15.24 126.21,15.24 OPT1.12
OPT_LIGA
  Top 0.406: CON01.6 132.4,12.38 130.33,10.32 126.21,10.32 OPT1.10
OPT_PANTOGRAFICA
  Top 0.406: CON01.11 136.21,20 139.06,22.86 142.4,22.86 OPT2.2
OPT_SENSOR1
  Top 0.406: CON01.5 136.84,12.38 138.91,10.32 142.4,10.32 OPT2.7
OPT_SOBE
  Bottom 0.406: CON01.12 132.4,20 127,25.4 126.21,25.4 OPT1.16
RA0
  Top 0.406: 190.82,20.16 189.87,20.16 188.28,21.75 R119.2 | 190.82,20.16 198.6,20.16 199.87,21.43 199.87,30.16 212.25,42.55 244.16,42.55 244.95,43.34 244.95,44.29 244.16,45.09 242.25,45.09 226.06,61.28 226.06,68.58 MCU.2 | TECLADO.5 190.82,20 190.82,20.16
RA1
  Bottom 0.406: MCU.3 223.52,68.58 232.89,59.21 242.89,59.21 249.24,52.86 249.24,23.81 241.14,15.72 187.48,15.72 TECLADO.6 185.74,21.75 R120.2
RA2
  Top 0.406: TECLADO.7 183.2,21.75 R121.2
  Bottom 0.406: MCU.4 220.82,68.58 207.17,54.93 205.1,54.93 204.47,54.29 204.47,51.28 202.88,49.69 202.88,34.13 193.68,24.92 185.26,24.92 183.2,22.86 183.2,21.91 R121.2
RA3
  Top 0.406: MCU.5 218.28,68.58 218.28,60.48 212.09,54.29 212.09,52.39 206.69,46.99 206.69,37.94 193.68,24.92 182.72,24.92 180.66,22.86 180.66,21.91 R122.2 180.66,21.75 TECLADO.8
RA6
  Top 0.406: C105.1 193.99,79.06 193.99,75.09 Q101.1 194.15,74.77 195.42,73.5 195.42,68.74 MCU.14
RA7
  Top 0.406: C106.1 198.75,79.06 198.91,78.9 198.91,75.09 Q101.2 198.91,74.77 198.12,73.98 198.12,68.74 MCU.13
RB0  (via drill 0.76)
  Top 0.406: OPT2.11 150.18,12.86 153.51,12.86 R168.2 157.64,15.88 161.61,11.91 232.41,11.91 238.6,18.1 v238.6,39.37
  Bottom 0.406: v238.6,39.37 238.6,47.47 235.9,50.16 214,50.16 210.82,53.34 MCU.33
RB1
  Top 0.406: R166.2 154.62,22.86 150.18,22.86 OPT2.15
  Bottom 0.406: R166.2 163.83,20.95 179.23,36.35 190.34,36.35 201.93,47.94 201.93,54.29 203.36,55.72 206.69,55.72 217.17,66.2 217.17,69.53 217.81,70.17 221.46,70.17 222.25,69.37 222.25,67.79 213.36,58.9 213.36,53.5 MCU.34
RB2
  Top 0.406: MCU.35 215.74,53.34 211.14,48.74 210.34,48.74 208.91,47.31 R151.1
RB3
  Top 0.406: MCU.36 218.28,53.34 218.28,51.91 213.84,47.47 R152.1
RB4
  Top 0.406: MCU.37 220.82,53.34 220.82,49.37 218.92,47.47 R153.1
RB5
  Top 0.406: MCU.38 223.52,53.34 223.52,47.94 224,47.47 R154.1
RB6  (via drill 0.76)
  Top 0.406: MCU.39 226.06,53.34 226.06,50.48 229.08,47.47 R155.1 | v234.63,40.96 239.24,40.96 240.19,40.01 240.19,39.05 243.05,36.2 JP100.5
  Bottom 0.406: v234.63,40.96 229.24,46.35 229.24,47.31 R155.1
RB7
  Top 0.406: MCU.40 228.6,53.34 234.16,47.78 234.16,47.47 R156.1
  Bottom 0.406: JP100.4 243.21,38.73 244.95,40.48 244.95,52.7 240.51,57.15 235.9,57.15 232.25,53.5 228.6,53.5 MCU.40
RC0
  Top 0.406: R4.2 138.27,52.39 OPT3.15
  Bottom 0.406: R4.2 153.19,64.93 189.23,64.93 192.88,68.58 MCU.15
RC1  (via drill 0.76)
  Top 0.406: v36.67,67.15 48.9,67.15 50.96,65.09 U2.13 | v104.78,63.18 110.81,63.18 112.55,64.93 U4.13
  Bottom 0.406: U1.13 20.16,65.09 22.23,67.15 v36.67,67.15 38.26,67.15 49.53,78.42 66.36,78.42 78.11,66.67 83.66,66.67 83.74,66.6 | MCU.16 190.34,68.74 188.75,70.33 117.95,70.33 112.71,65.09 U4.13 | 83.74,66.6 83.82,66.67 101.28,66.67 v104.78,63.18 | 83.74,66.6 82.23,65.09 U3.13
RC2  (via drill 0.76)
  Top 0.406: 76.83,46.04 76.83,48.9 79.53,51.59 79.53,64.93 U3.12 | 76.83,46.04 78.42,44.45 93.03,44.45 111.12,62.55 v112.39,62.55 | v67.79,40.64 71.28,40.64 76.68,46.04 76.83,46.04
  Bottom 0.406: 39.37,63.34 19.21,63.34 17.62,64.93 U1.12 | 39.37,63.34 41.43,65.41 43.34,65.41 45.4,63.34 46.83,63.34 48.42,64.93 U2.12 | 112.39,63.34 111.76,63.34 110.17,64.93 U4.12 | 112.39,63.34 115.73,63.34 116.52,64.14 116.52,66.04 117.16,66.67 131.13,66.67 132.08,65.72 184.94,65.72 187.8,68.58 MCU.17 | 112.39,63.34 v112.39,62.55 | v67.79,40.64 61.75,40.64 40.64,61.75 40.64,61.91 39.37,63.18 39.37,63.34
RC3
  Top 0.406: IC101.6 173.35,87.95 176.37,87.95 R123.2 176.69,87.95 177.48,87.95 185.26,80.17 185.26,68.74 MCU.18
RC4
  Top 0.406: IC101.5 173.35,85.41 176.37,85.41 R124.1 176.53,85.25 178.75,83.03 178.75,73.03 177.8,72.07 176.53,72.07 163.51,59.05 163.51,56.83 164.78,55.56 164.78,53.18 166.85,51.12 183.04,51.12 185.26,53.34 MCU.23
RC5
  Top 0.965: MCU.24 187.96,53.34 187.96,49.05 IC100.3 188.44,48.9 190.34,48.9 IC100.2
RC6
  Bottom 0.965: MCU.25 190.34,53.34 189.39,52.39 189.39,52.23 187.96,50.8 187.17,50.8 185.42,49.05 IC100.4
RC7
  Top 0.965: MCU.26 193.04,53.34 193.04,49.05 IC100.1
RD0  (via drill 0.76)
  Top 0.406: R167.2 154.62,20.32 150.18,20.32 OPT2.14 | v176.05,61.91 182.72,68.58 MCU.19
  Bottom 0.406: v176.05,61.91 174.62,63.34 160.5,63.34 140.49,43.34 140.49,35.24 148.59,27.15 148.59,21.91 150.02,20.48 OPT2.14
RD1  (via drill 0.76)
  Top 0.406: v129.22,68.74 125.41,72.55 U4.3
  Bottom 0.406: v129.22,68.74 130.02,68.74 132.24,66.52 178.12,66.52 180.18,68.58 MCU.20
RD2
  Top 0.406: MCU.21 180.18,53.5 180.18,55.4 177.8,57.78 U$102.4
RD3
  Top 0.406: MCU.22 182.88,53.5 182.88,57.78 U$102.6
RD4
  Top 0.406: MCU.27 195.58,53.5 195.58,57.78 U$102.11
RD5
  Top 0.406: MCU.28 198.12,53.5 198.12,57.78 U$102.12
RD6
  Top 0.406: MCU.29 200.66,53.5 200.66,57.78 U$102.13
RD7
  Top 0.406: MCU.30 203.2,53.5 203.2,57.78 U$102.14
RE0  (via drill 0.76)
  Top 0.406: R169.2 150.97,7.78 150.18,7.78 OPT2.9 | v160.34,16.03 160.34,39.37 170.02,49.05 176.05,49.05 177.96,47.15 199.07,47.15 204.47,52.55 204.47,60.17 210.66,66.36 210.66,68.58 MCU.8
  Bottom 0.406: v160.34,16.03 157.64,13.34 R169.2
RE1
  Top 0.406: R162.2 208.28,68.74 MCU.9
RE2
  Top 0.406: R3.2 138.27,49.85 OPT3.14
  Bottom 0.406: R3.2 141.76,49.85 156.05,64.14 190.66,64.14 194.31,67.79 194.31,69.53 194.94,70.17 204.15,70.17 205.58,68.74 MCU.10
RS485-A
  Top 0.965: CON01.17 141.76,27.62 144.46,30.32 144.46,37.78 R103.1
RS485-B
  Top 0.965: CON01.19 141.92,30.16 R101.1
SAIDA_FUSIVEL
  Top 0.965: FUSIVEL_GERAL.2 20.32,24.77 20.95,25.4 25.72,25.4 28.42,22.7 V99.2 32.54,22.54 D100.C 32.7,22.07 32.7,18.57 D104.A
  Top 2: 18.1,23.18 18.73,23.18 20.32,24.77 20.95,24.77 22.86,22.86
VBAT+  (via drill 1.2 pad 3.81)
  Top 1.016: 161.61,68.26 v161.61,73.34 161.61,78.42
  Bottom 0.965: IC101.3 165.58,87.79 161.61,83.82 161.61,78.58 G100.+ 161.61,77.95 v161.61,73.34
VOO
  Top 0.965: LCD-CONTR.S 173.04,52.55 173.04,55.4 175.1,57.47 175.1,57.78 U$102.3
(copper drawn outside any net)
  shapes: Bottom area x1, Top area x1

## Text on the board
Top: COMPONENTES / alex henrique / 27/02/15
Bottom: SOLDA / alex henrique / 27/02/15
INFORMACAO: COMUM | CH-SOBE | CH-PARA | CH-AUDIO | CH-IR-ATE | CH-DESCE | CH-NIVELA